# Altium PCB DRV8432.PcbDoc
Units mil, origin at the board's own origin, x right, y up, seen from the top; angles counter-clockwise.
Board outline 3164 x 1882 mil, 4 copper layers (Top Layer, Int1 (GND), Int2 (Signal), Bottom Layer), stack 57.373 mil thick; 51 components, 30 nets, 144 pads, 1485 vias.
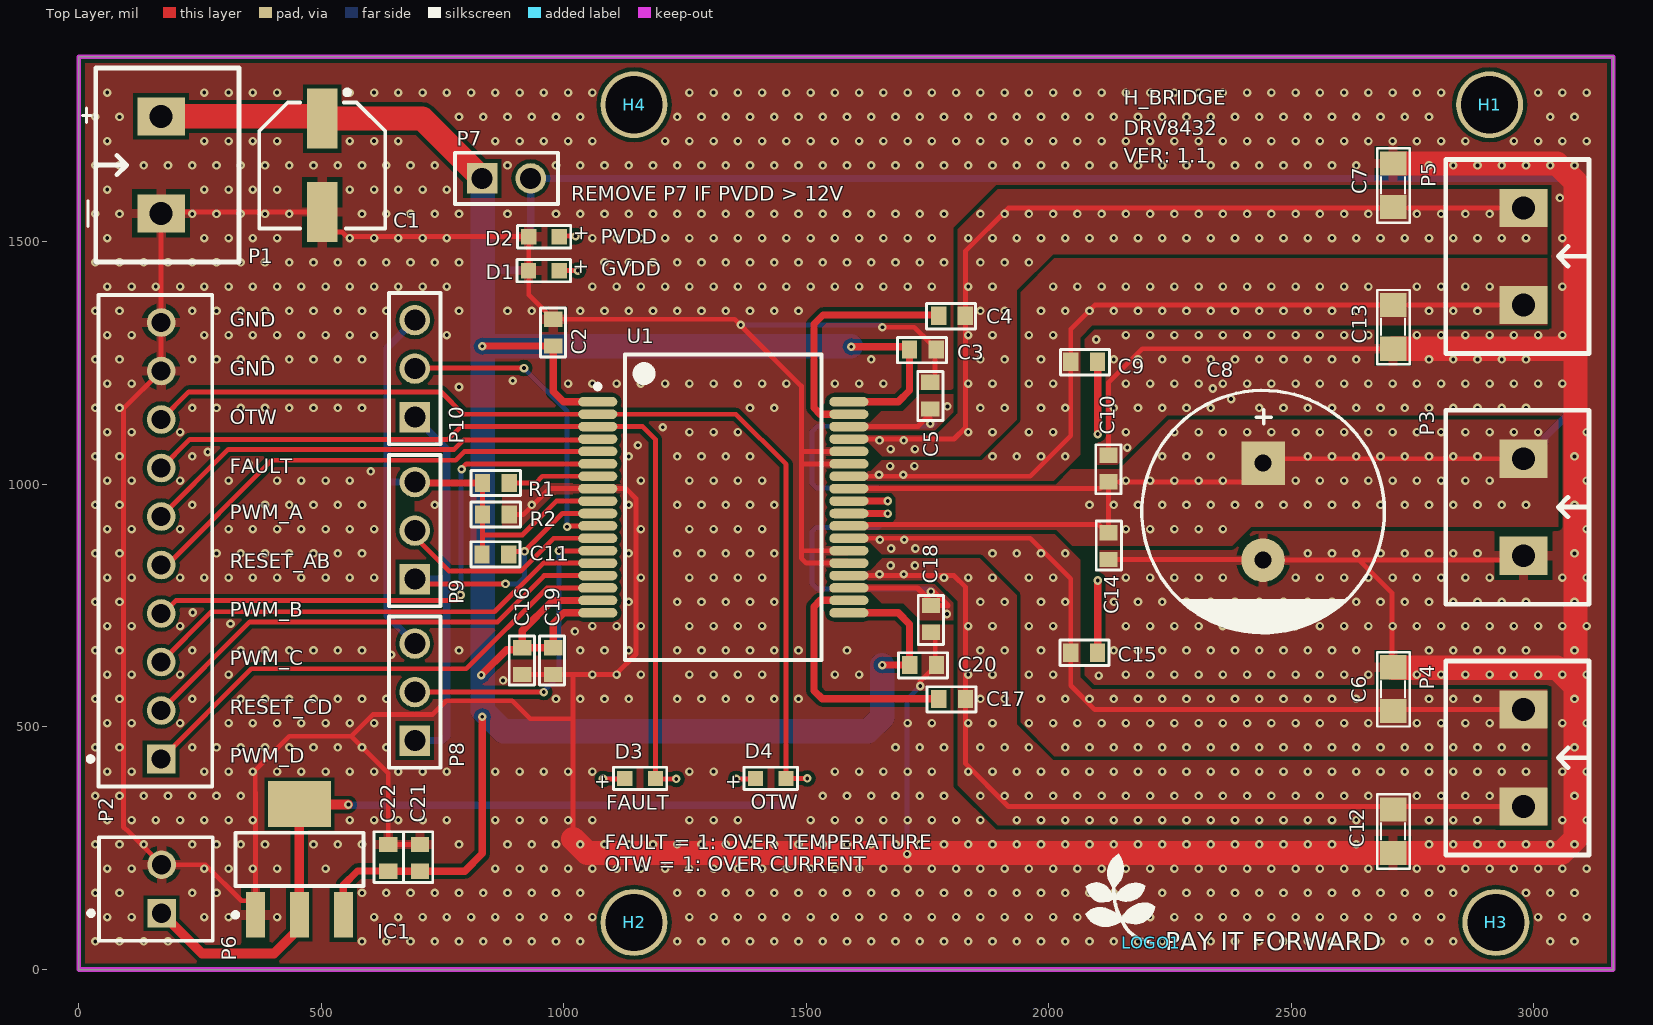
[diagram p0: Top Layer view]
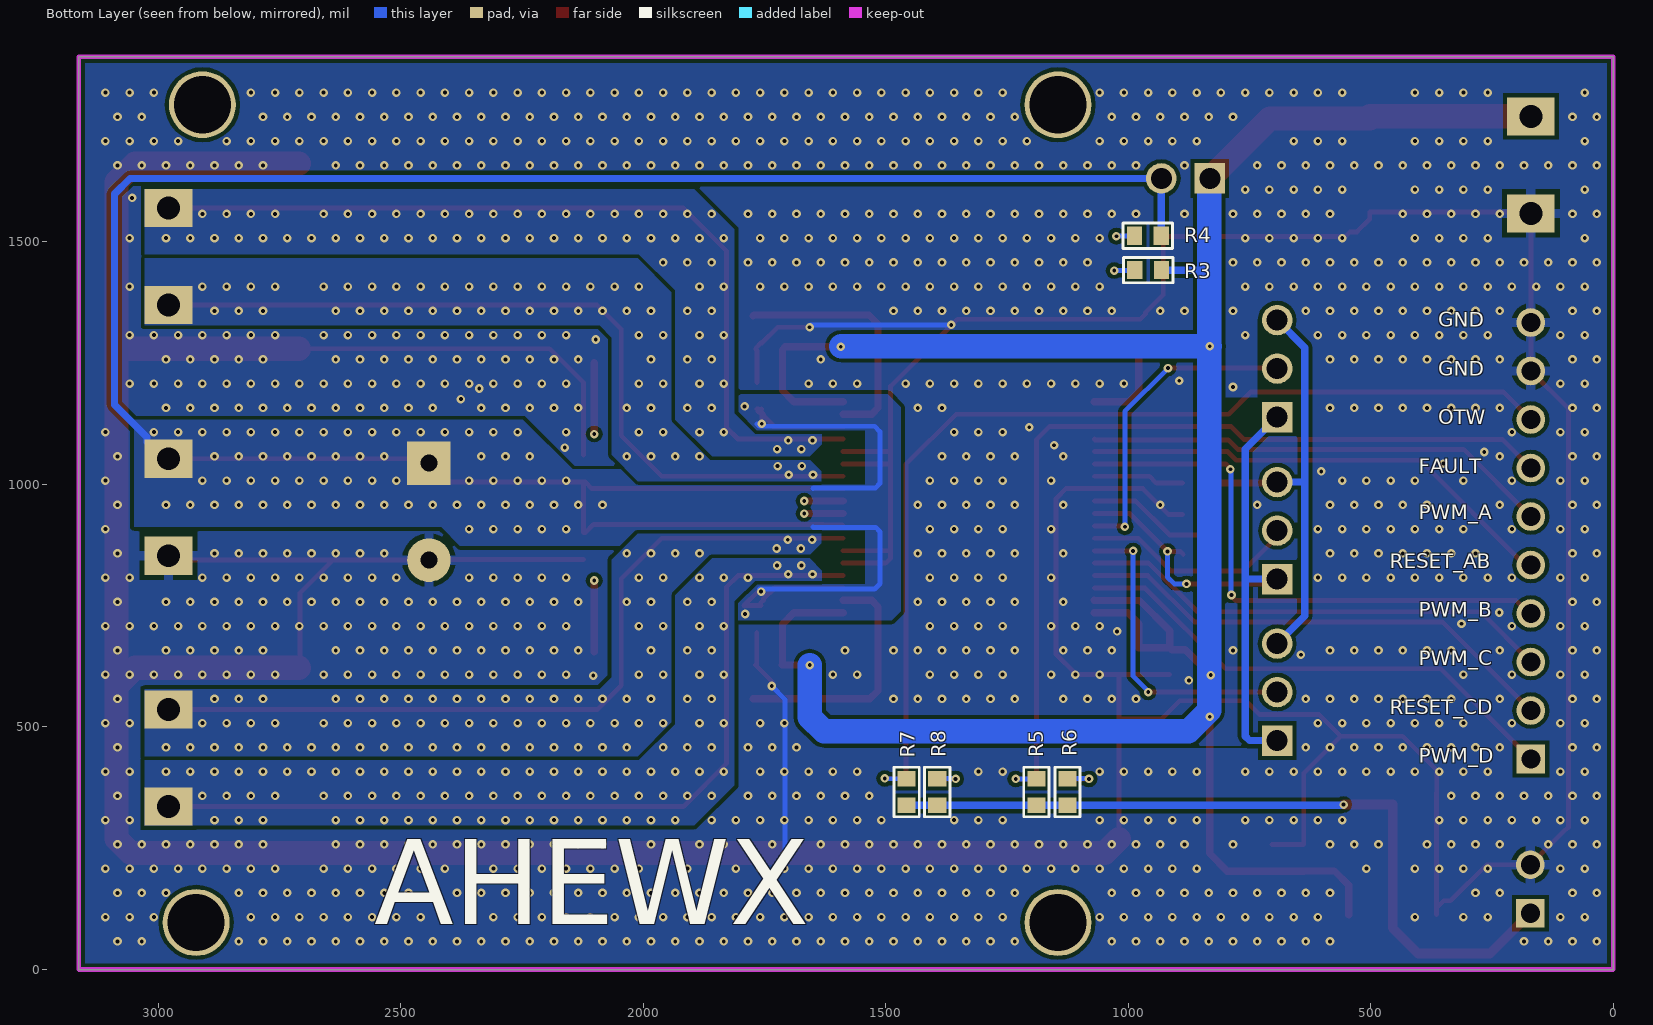
[diagram p1: Bottom Layer view, seen from below]
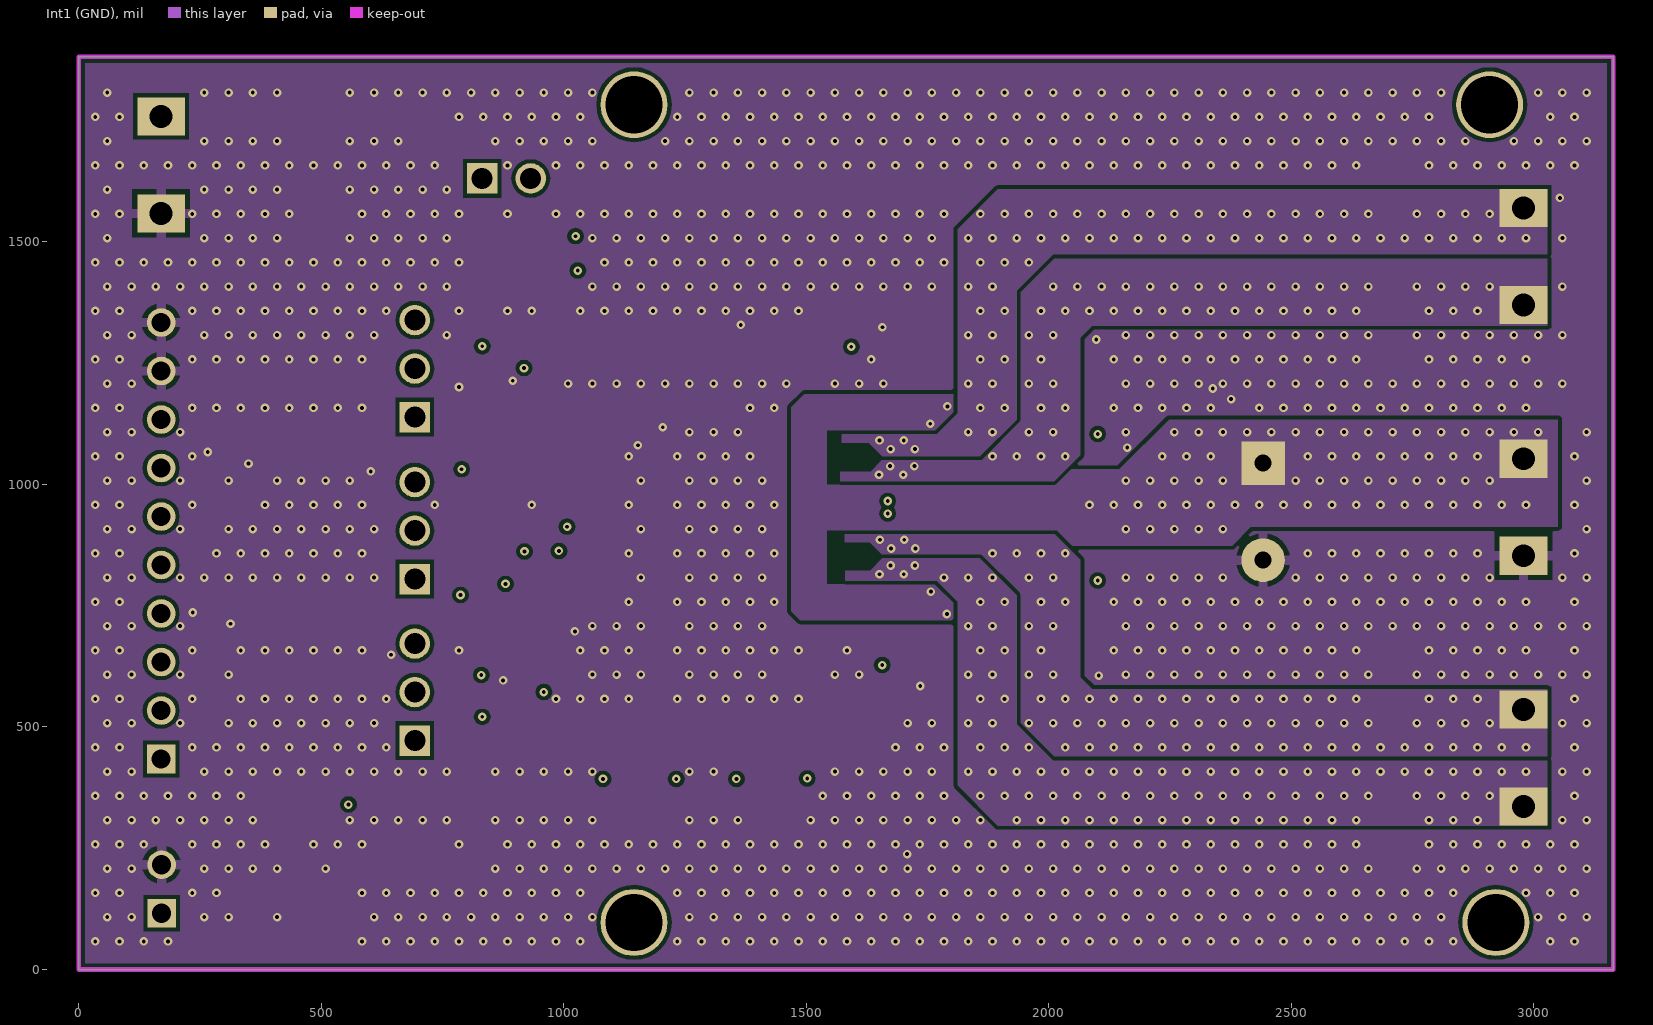
[diagram p2: Int1 (GND)]
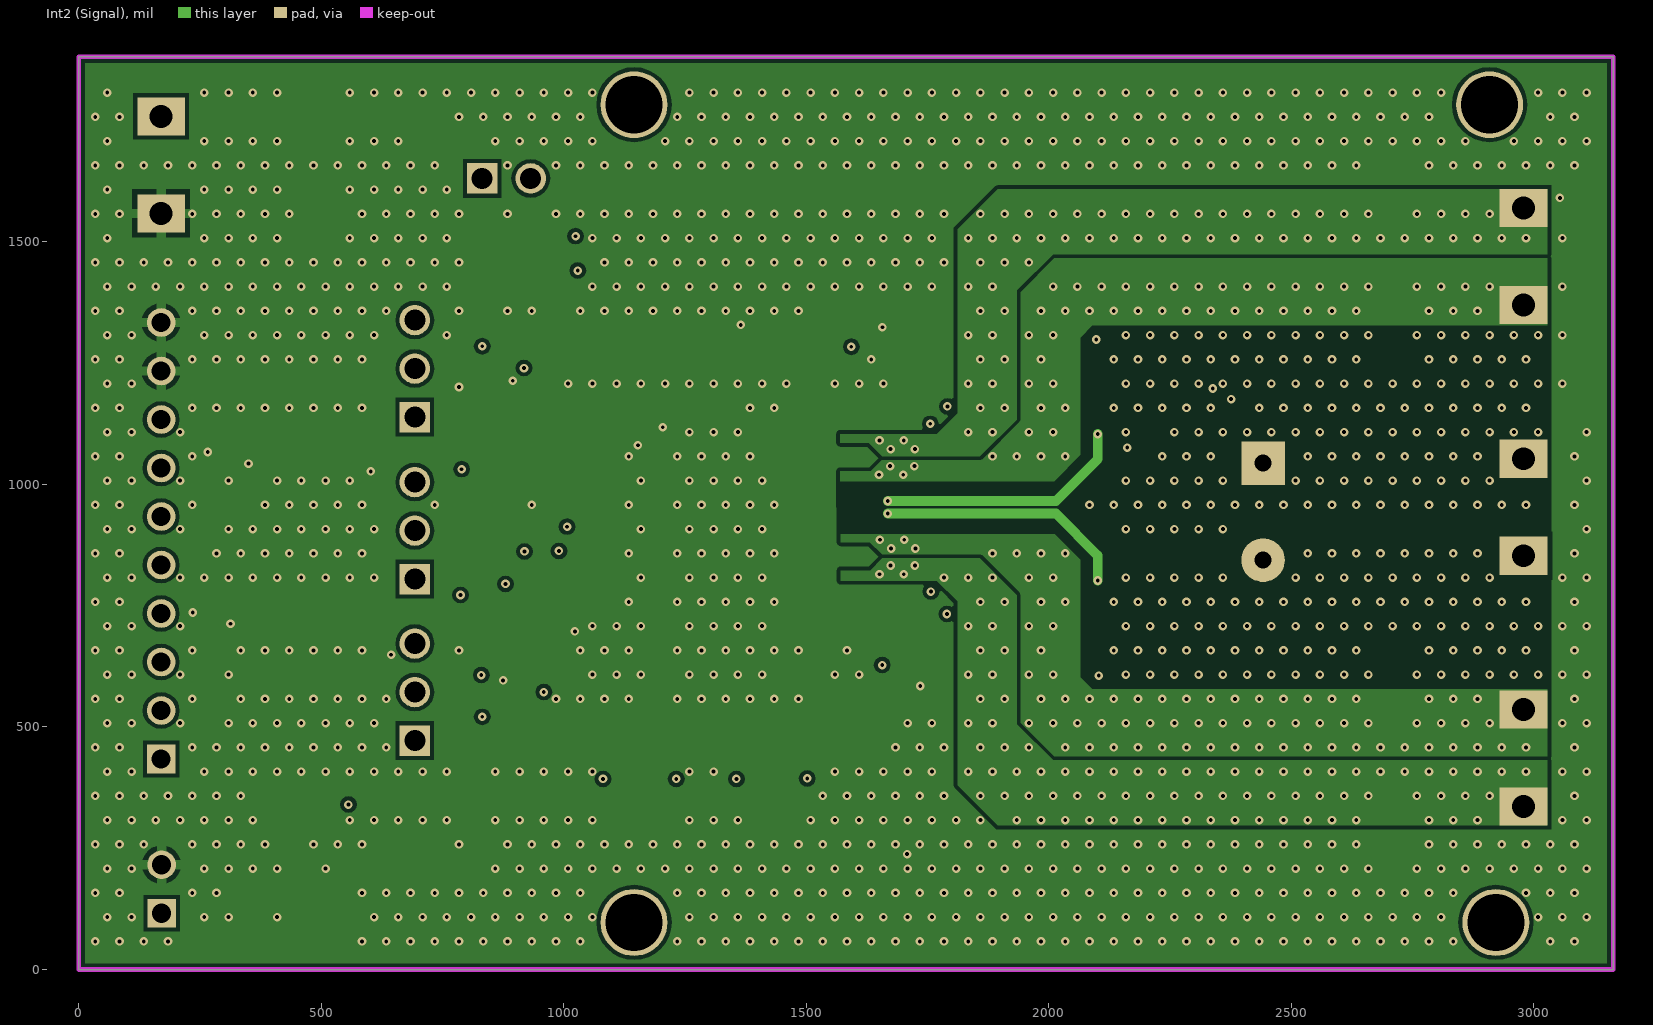
[diagram p3: Int2 (Signal)]
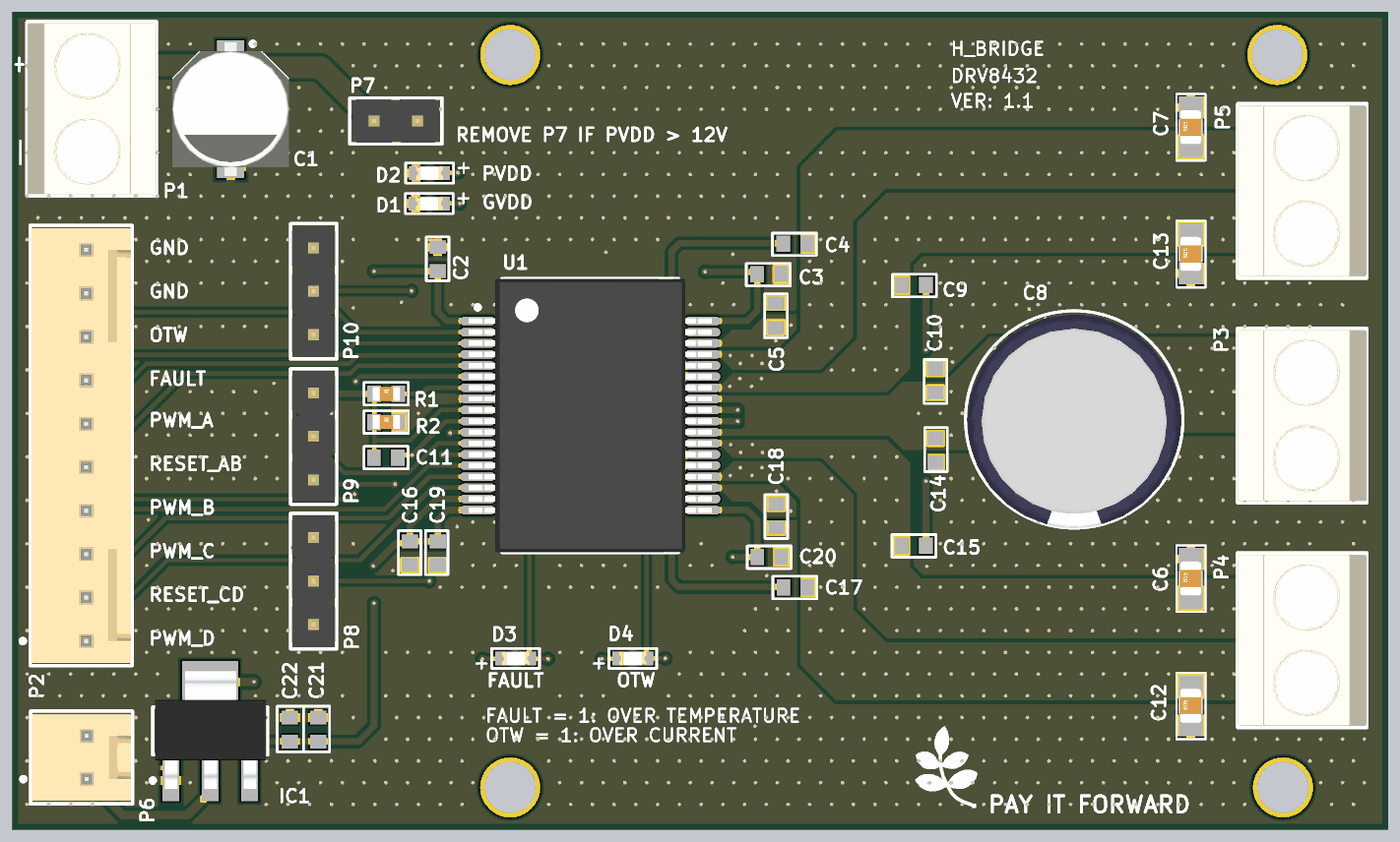
[diagram p4: 3D render of the assembled board from above, using the file's embedded part models]
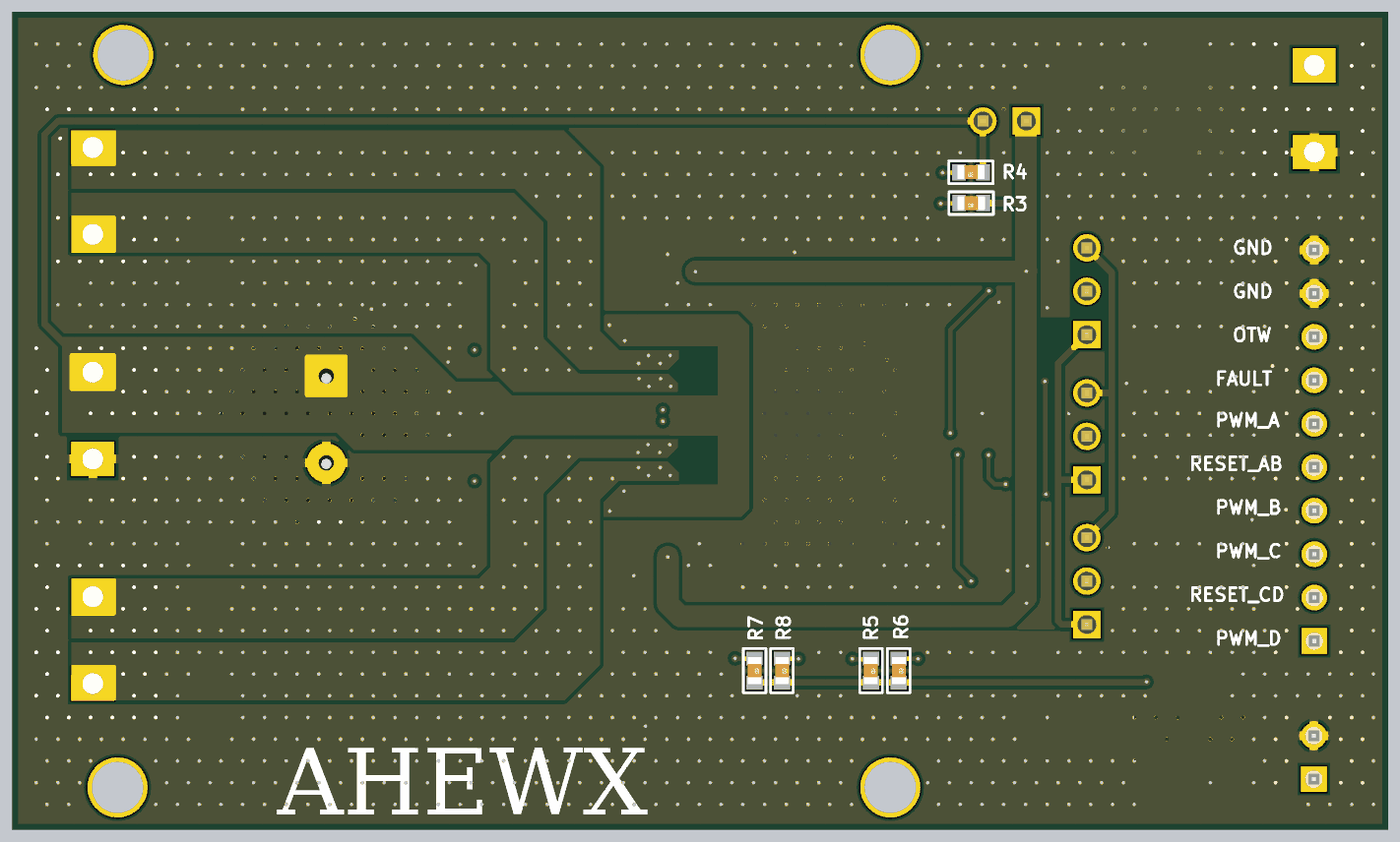
[diagram p5: 3D render of the assembled board from below, using the file's embedded part models]

## Layer stack, top to bottom
Top Solder: solder mask 1, SM-001, Dk 4
Top Layer: signal copper 1.378
Dielectric 1: prepreg 7.1, PP-021, Dk 4.7
Int1 (GND): signal copper 0.7087
Dielectric 3: core 39, Core-042, Dk 4.6
Int2 (Signal): signal copper 0.7087
Dielectric 5: prepreg 7.1, PP-021, Dk 4.7
Bottom Layer: signal copper 1.378
Bottom Solder: solder mask 1, SM-001, Dk 4

## Board outline
0,0 3164,0 3164,1882 0,1882

## Design rules (kind name [scope] priority, off if disabled: settings)
BoardOutlineClearance [All] p1: gap=7.87 ignorepadtopadclearanceinfootprint=FALSE except(15.75: Arc-SplitBarrior Arc-SplitContinuation Track-SplitBarrior Track-SplitContinuation SMDPad-SplitBarrior SMDPad-SplitContinuation THPad-SplitBarrior THPad-SplitContinuation Via-SplitBarrior Via-SplitContinuation Fill-SplitBarrior Fill-SplitContinuation Poly-SplitBarrior Poly-SplitContinuation Region-SplitBarrior Region-SplitContinuation Text-SplitBarrior Text-SplitContinuation)
Clearance "Clearance Bottom Layer" [OnLayer('Bottom Layer')] p1: gap=8 ignorepadtopadclearanceinfootprint=TRUE except(10: Arc-Text Track-Text SMDPad-Text THPad-Text Via-Text Fill-Text Poly-Text Region-Text Text-Text)
Clearance "Clearance Top Layer" [OnLayer('Top Layer')] p2: gap=8 ignorepadtopadclearanceinfootprint=TRUE except(10: Arc-Text Track-Text SMDPad-Text THPad-Text Via-Text Fill-Text Poly-Text Region-Text Text-Text)
Clearance [All] p3: gap=7.87 ignorepadtopadclearanceinfootprint=FALSE except(3.5: Arc-Arc Arc-Track Arc-SMDPad Track-Track Track-SMDPad SMDPad-SMDPad; 5: Arc-Via Track-Via SMDPad-Via THPad-Via Via-Via; 10: Arc-Text Track-Text SMDPad-Text THPad-Text Via-Text Fill-Text Poly-Text Region-Text Text-Text)
HoleSize [All] p1: absolutevalues=TRUE maxlimit=248.03 minlimit=7.87 maxpercent=80.000 minpercent=20.000
MinimumAnnularRing [All] p1: minimumring=3
MinimumSolderMaskSliver [All] p1: minsoldermaskwidth=3.94
PolygonConnect PolygonConnect_1 [All] p1: thpad.connectstyle=Relief thpad.reliefconductorwidth=20 thpad.reliefentries=4 thpad.polygonreliefangle="90 Angle" thpad.airgapwidth=10 smdpad.connectstyle=Relief smdpad.reliefconductorwidth=20 smdpad.reliefentries=4 smdpad.polygonreliefangle="90 Angle" smdpad.airgapwidth=10 via.connectstyle=Direct via.reliefconductorwidth=20 via.reliefentries=4 via.polygonreliefangle="90 Angle" via.airgapwidth=10
RoutingCorners [All] p1: cornerstyle=Round minsetback=100 maxsetback=100
RoutingVias [All] p1: holewidth=19.68 width=39.37 viastyle="Through Hole" minholewidth=7.87 minwidth=17.72 maxholewidth=39.37 maxwidth=78.74
SilkToSilkClearance [All] p1: silktosilkclearance=3.94
SilkToSolderMaskClearance [IsPad] p1: minsilkscreentomaskgap=3.94 clearancetoexposedcopper=TRUE
SolderMaskExpansion [All] p1: expansion=4 istentingtop=FALSE
Width [All] p1: maxlimit=100 minlimit=3.5 preferedwidth=15
25 further rules are at their usual default settings.

## Components (designator, comment, footprint, x,y, rotation, side; value= is the part's Value field where it differs from the comment)
C1 "Cap Pol SMD" "CAP ALU SIZE D" 502,1658 r270 top value=47uF
C2 "Cap Non-Pol SMD" CAP-SM-0603 978.44,1313 r270 top value=1uF
C3 "Cap Non-Pol SMD" CAP-SM-0603 1740.56,1278 r180 top value=1uF
C4 "Cap Non-Pol SMD" CAP-SM-0603 1800.56,1348 r180 top value=100nF
C5 "Cap Non-Pol SMD" CAP-SM-0603 1755.7,1183.34 r270 top value=100nF
C6 "Cap Non-Pol SMD" CAP-SM-0805 2710,533 r90 top value=1uF
C7 "Cap Non-Pol SMD" CAP-SM-0805 2710,1572 r90 top value=1uF
C8 "Cap Pol" CP2/5 2442,1044 r270 top value=1000uF
C9 "Cap Non-Pol SMD" CAP-SM-0603 2073,1253 r180 top value=100nF
C10 "Cap Non-Pol SMD" CAP-SM-0603 2123,1033 r90 top value=100nF
C11 "Cap Non-Pol SMD" CAP-SM-0603 859,856 r180 top value=100nF
C12 "Cap Non-Pol SMD" CAP-SM-0805 2710,240 r90 top value=1uF
C13 "Cap Non-Pol SMD" CAP-SM-0805 2710,1280 r90 top value=1uF
C14 "Cap Non-Pol SMD" CAP-SM-0603 2123,873 r90 top value=100nF
C15 "Cap Non-Pol SMD" CAP-SM-0603 2073,653 r0 top value=100nF
C16 "Cap Non-Pol SMD" CAP-SM-0603 914.44,636 r90 top value=1uF
C17 "Cap Non-Pol SMD" CAP-SM-0603 1800.94,557.63 r0 top value=100nF
C18 "Cap Non-Pol SMD" CAP-SM-0603 1757,723 r270 top value=100nF
C19 "Cap Non-Pol SMD" CAP-SM-0603 978.44,636 r90 top value=1uF
C20 "Cap Non-Pol SMD" CAP-SM-0603 1740.94,627.63 r180 top value=1uF
C21 "Cap Non-Pol SMD" CAP-SM-0603 703.46,230.31 r270 top value=1uF
C22 "Cap Non-Pol SMD" CAP-SM-0603 638.06,230.31 r270 top value=100nF
D1 "Red, 2V" WL-SMCW_0603_H=0.7mm 958.99,1440.97 r0 top
D2 "Red, 2V" WL-SMCW_0603_H=0.7mm 959.5,1511 r0 top
D3 "Red, 2V" WL-SMCW_0603_H=0.7mm 1157.5,394 r180 top
D4 "Red, 2V" WL-SMCW_0603_H=0.7mm 1426.99,394 r180 top
H1 "Hole" "LO KHOAN 3MM" 2909,1783 r0 top
H2 "Hole" "LO KHOAN 3MM" 1145,97 r0 top
H3 "Hole" "LO KHOAN 3MM" 2922,97 r0 top
H4 "Hole" "LO KHOAN 3MM" 1145,1783 r0 top
IC1 "LM1117" SOT223-4N 455,227 r90 top value=LM317
LOGO1 "LOGO PIF" "PIF LOGO SMALL TOP" 2021,244 r180 top
P1 "Domino 2" "DOMINO 2- 5mm" 170,1659 r90 top
P2 "61901011121" 61901011121 158.19,884 r270 top
P3 "Domino 2" "DOMINO 2- 5mm" 2979,953 r270 top
P4 "Domino 2" "DOMINO 2- 5mm" 2979,436 r270 top
P5 "Domino 2" "DOMINO 2- 5mm" 2979,1470 r270 top
P6 "61900211121" 61900211121 159.19,166 r270 top
P7 "61300211121" 61300211121 882,1631 r0 top
P8 "61300311121" 61300311121 693,572 r90 top
P9 "61300311121" 61300311121 693,905 r90 top
P10 "61300311121" 61300311121 693,1239 r90 top
R1 "RESISTOR SMD" RES-SM-0603 860,1003 r0 top value=47K
R2 "RESISTOR SMD" RES-SM-0603 860,938 r0 top value=1
R3 "RESISTOR SMD" RES-SM-0603 958.99,1441.97 r0 bottom value=10K
R4 "RESISTOR SMD" RES-SM-0603 959.5,1513 r0 bottom value=10K
R5 "RESISTOR SMD" RES-SM-0603 1189.5,366 r270 bottom value=4.7K
R6 "RESISTOR SMD" RES-SM-0603 1125.5,366 r270 bottom value=330
R7 "RESISTOR SMD" RES-SM-0603 1456.99,366 r270 bottom value=4.7K
R8 "RESISTOR SMD" RES-SM-0603 1393.99,366 r270 bottom value=330
U1 "DRV8432" SOP65P1420X360-36N 1329,953 r0 top

## Footprints (in the part's own frame and the unit in brackets; to place one, negate y for a bottom-side part, rotate by r counter-clockwise, add the part's x,y. Pads: shape width x height; smd on the part's side, far side on the other; paste and mask are expansions set on the pad)
61300211121 [mm] "Pin Header, pitch 2.54 mm, THT, Vertical, single row, 2p"
  rect 1.6x1.6 hole 1.1: 1(-1.27,0)
  round 1.6 hole 1.1: 2(1.27,0)
  silkscreen extent -2.69,-1.35 2.69,1.35, body extent -2.54,-1.27 2.54,1.27, height 8.57
61300311121 [mm] "Pin Header, pitch 2.54 mm, THT, Vertical, single row, 3p"
  rect 1.6x1.6 hole 1.1: 1(-2.54,0)
  round 1.6 hole 1.1: 2(0,0) 3(2.54,0)
  silkscreen extent -3.96,-1.35 3.96,1.35, body extent -3.81,-1.27 3.81,1.27, height 8.57
61900211121 [mm] "2.54mm Male Locking Header, 2p"
  rect 1.5x1.5 hole 1: 1(1.27,0.3)
  round 1.5 hole 1: 2(-1.27,0.3)
  silkscreen extent -2.71,-3.52 2.71,2.98, body extent -2.54,-2.9 2.54,2.9, height 11.53
61901011121 [mm] "2.54mm Male Locking Header, 10p"
  rect 1.5x1.5 hole 1: 1(11.43,0.3)
  round 1.5 hole 1: 2(8.89,0.3) 3(6.35,0.3) 4(3.81,0.3) 5(1.27,0.3) 6(-1.27,0.3) 7(-3.81,0.3) 8(-6.35,0.3) 9(-8.89,0.3) 10(-11.43,0.3)
  silkscreen extent -12.87,-3.52 12.87,2.98, body extent -12.7,-2.9 12.7,2.9, height 11.53
"CAP ALU SIZE D" [mm] "Capacitor, Aluminium Electrolytric, 6.6mm L X 6.6mm W X 5.4mm H, IPC Medium Density"
  rect 3.15x1.6 smd: 1(-2.45,0) 2(2.45,0)
  silkscreen extent -3.95,-3.3 3.3,3.3, body extent -3.9,-3.4 3.9,3.4, height 5.7
CAP-SM-0603 [mm] "SMD Ceramic Capacitor Size 0603"
  rect 0.8x0.95 smd: 1(-0.7,0) 2(0.7,0)
  body extent -0.85,-0.45 0.85,0.45, height 0.6
CAP-SM-0805 [mil]
  rect 50x55 smd: 1(0,0) 2(90,0)
  silkscreen extent -32,-34 121,33, body extent 6,-25 84,25, height 31
CP2/5 [mil] "Tu hoa 1000uF/25V,50V"
  rect 90x90 hole 35: 1(0,0)
  round 90 hole 35: 2(200,0)
  silkscreen extent -150,-250 350,250, body extent -142,-246 350,246, height 984
"DOMINO 2- 5mm" [mm]
  rect 2x2.5 hole 1.2: 1(-2.54,0) 2(2.54,0)
  silkscreen extent -5.08,-4.08 5.08,3.43, body extent -5,-4.07 5,3.43, height 10
"LO KHOAN 3MM" [mil]
  round 138 hole 118.1: 1(0,0)
"PIF LOGO SMALL TOP" [mil]
  rect 10x10 on Top Overlay: 1(-190,189)
  silkscreen extent -199,5 -55,189
RES-SM-0603 [mm]
  rect 0.8x0.95 smd: 1(-0.7,0) 2(0.7,0)
  silkscreen extent -1.3,-0.66 1.3,0.66, body extent -0.8,-0.4 0.8,0.4, height 0.3
SOP65P1420X360-36N [mm] "SOP, 36-Leads, Body 15.90x11.00mm, Pitch 0.65mm, IPC Medium Density"
  oval 2.05x0.5 smd: 1(-6.575,5.525) 2(-6.575,4.875) 3(-6.575,4.225) 4(-6.575,3.575) 5(-6.575,2.925) 6(-6.575,2.275) 7(-6.575,1.625) 8(-6.575,0.975) 9(-6.575,0.325) 10(-6.575,-0.325) 11(-6.575,-0.975) 12(-6.575,-1.625) 13(-6.575,-2.275) 14(-6.575,-2.925) 15(-6.575,-3.575) 16(-6.575,-4.225) 17(-6.575,-4.875) 18(-6.575,-5.525) 19(6.575,-5.525) 20(6.575,-4.875) 21(6.575,-4.225) 22(6.575,-3.575) 23(6.575,-2.925) 24(6.575,-2.275) 25(6.575,-1.625) 26(6.575,-0.975) 27(6.575,-0.325) 28(6.575,0.325) 29(6.575,0.975) 30(6.575,1.625) 31(6.575,2.275) 32(6.575,2.925) 33(6.575,3.575) 34(6.575,4.225) 35(6.575,4.875) 36(6.575,5.525)
  silkscreen extent -6.7,-8 5.15,8, body extent -7.1,-8 7.1,8, height 3.6
SOT223-4N [mm] "SOT223, 4-Leads, Body 6.5x3.5mm, Pitch 2.3mm, Lead Span 7mm, IPC Medium Density"
  rect 2.4x1 smd: 1(-2.9,2.3) 2(-2.9,0) 3(-2.9,-2.3)
  rect 2.4x3.3 smd: 4(2.9,0)
  silkscreen extent -3.02,-3.35 1.4,3.47, body extent -3.39,-3.27 3.5,3.23, height 1.72
WL-SMCW_0603_H=0.7mm [mm] "SMD Mono-color Chip LED, body 1.6x0.8mm"
  rect 0.8x0.8 smd: 1(-0.8,0) 2(0.8,0)
  silkscreen extent -1.4,-0.58 1.4,0.58, body extent -0.8,-0.4 0.8,0.4, height 0.7

## Part data
C1 C8: "Polarized Capacitor (Radial)"
C2 C3 C4 C5 C6 C7 C9 C10 C11 C12 C13 C14 C15 C16 C17 C18 C19 C20 C21 C22: "Capacitor"
D1 D2 D3 D4: library part 150060RS75000, "WL-SMCW SMT Mono-color Chip LED Waterclear, size 0603, Red, 2V, 140deg", Emitting Color=Red, Forward Voltage typ.=2V, Operating Temperature="-40 to +85degC", Chip Technology=AlInGaP, ComponentLink1Description=Manufacturer, ComponentLink1URL=http://www.we-online.de, ComponentLink2Description=Datasheet, ComponentLink2URL=https://www.we-online.com/catalog/datasheet/150060RS75000.pdf, Dominant Wavelength typ.=625nm, Luminous Intensity typ.=250mcd, Mounting Technology=SMT, Packaging="Tape and Reel", Part Number=150060RS75000, Peak Wavelength typ.=630nm, Published Date="December 2019", Publisher="Wurth Elektronik", Size=0603, Viewing Angle=140deg
H1 H2 H3 H4: "Hole 3mm"
IC1: "Available in 1.8V, 2.5V, 2.85V, 3.3V, 5V, and  Adjustable Versions"
P1 P3 P4 P5: "Domino, 2-Pin", LatestRevisionDate=17-Jul-2002, LatestRevisionNote="Re-released for DXP Platform.", Publisher="Altium Limited"
P2: "WR-WTB THT Male Vertical Locking Header, pitch 2.54mm, 10p", Contact Resistance=20mOhm, Operating Temperature="-40 to +105degC", Rated Current=3A, Withstanding Voltage=1000VAC, Working Voltage=250VAC, ComponentLink1Description=Manufacturer, ComponentLink1URL=http://www.we-online.de, ComponentLink2Description=Datasheet, ComponentLink2URL=https://www.we-online.com/catalog/datasheet/61901011121.pdf, Gender=Male, Mounting Technology=THT, Packaging=Bag, Part Number=61901011121, Pin Number=10, Pitch=2.54mm, Published Date="January 2020", Publisher="Wurth Elektronik", Type=Vertical
P6: "WR-WTB THT Male Vertical Locking Header, pitch 2.54mm, 2p", Contact Resistance=20mOhm, Operating Temperature="-40 to +105degC", Rated Current=3A, Withstanding Voltage=1000VAC, Working Voltage=250VAC, ComponentLink1Description=Manufacturer, ComponentLink1URL=http://www.we-online.de, ComponentLink2Description=Datasheet, ComponentLink2URL=https://www.we-online.com/catalog/datasheet/61900211121.pdf, Gender=Male, Mounting Technology=THT, Packaging=Bag, Part Number=61900211121, Pin Number=2, Pitch=2.54mm, Published Date="January 2020", Publisher="Wurth Elektronik", Type=Vertical
P7: "WR-PHD Pin Header, THT, pitch 2.54mm, Single Row, Vertical, 2p", Contact Resistance=20mOhm, Manufacturer="Wurth Elektronik", Operating Temperature="-40 to +105degC", Rated Current=3A, Withstanding Voltage=500VAC, Working Voltage=250VAC, ComponentLink1Description=Manufacturer, ComponentLink1URL=http://www.we-online.de, ComponentLink2Description=Datasheet, ComponentLink2URL=https://www.we-online.com/catalog/datasheet/61300211121.pdf, Gender="Pin Header", Manufacturer Part Number=61300211121, Mounting Technology=THT, Orientation=Vertical, Packaging=Bag, Pin Number=2, Pitch=2.54mm, Published Date="May 2020", Row Number=Single
P8 P9 P10: "WR-PHD Pin Header, THT, pitch 2.54mm, Single Row, Vertical, 3p", Contact Resistance=20mOhm, Manufacturer="Wurth Elektronik", Operating Temperature="-40 to +105degC", Rated Current=3A, Withstanding Voltage=500VAC, Working Voltage=250VAC, ComponentLink1Description=Manufacturer, ComponentLink1URL=http://www.we-online.de, ComponentLink2Description=Datasheet, ComponentLink2URL=https://www.we-online.com/catalog/datasheet/61300311121.pdf, Gender="Pin Header", Manufacturer Part Number=61300311121, Mounting Technology=THT, Orientation=Vertical, Packaging=Bag, Pin Number=3, Pitch=2.54mm, Published Date="May 2020", Row Number=Single
R1 R2 R3 R4 R5 R6 R7 R8: "Resistor"

## Via types
v1: diameter 17.72/17.72/17.72/17.72 (per signal layer), hole 7.87, Top Layer to Bottom Layer, tented both sides, 1437 vias
v2: diameter 17.72, hole 7.87, Top Layer to Bottom Layer, tented both sides, 48 vias

## Nets (pads, with @x,y where several pads share a name; then routed paths per layer and width w, separated by ;. In a path a pad name is that pad's centre, name@x,y a point inside that pad or via, vN(x,y) a via of type N, cw(c..) or ccw(c..) an arc to the next point about the centre after c; other vN are vias at no path point)
5+: IC1.2 IC1.4 P6.1 R5.2 R6.2 R7.2 R8.2 | length 1598.8
  Top Layer w20: P6.1 254,33 402.73,33 455,85.27 IC1.2 455,341 456,340 v2(556,340)
  Bottom Layer w15: v2(556,340) 557.56,340 559.11,338.44 R6.2 R5.2 R8.2 R7.2
AGND: C11.2 P8.3 P9.3 P10.3 R1.1 R2.1 U1.9 | length 1307.3
  Top Layer w10: P9.3 P9.3@695,1003 ; C11.2@832.44,874 832.44,896 ; R1.1 R2.1 832.44,896 ; U1.9 984.8,965.8 915,896 832.44,896
  Top Layer w15: P9.3@695,1003 R1.1
  Bottom Layer w15: P8.3 636,729 636,1005.5 ; P9.3 636.5,1005 636,1005.5 ; P10.3 636,1282 636,1005.5
FAULT: D3.1 P2.7 R5.1 U1.3 | length 1853
  Top Layer w10: P2.7 229,1093 761.54,1093 787.88,1119.34 U1.3 1162.66,1119.34 1188.99,1093.01 D3.1 ; D3.1@1188,393 v2(1232,393)
  Bottom Layer w10: R5.1@1187.5,392.44 1231.44,392.44 v2(1232,393)
GND: C1.2 C2.1 C3.1 C5.1 C6.2 C7.2 C8.2 C10.2 C12.1 C13.1 C14.1 C16.1 C18.2 C19.1 C20.1 C21.1 C22.1 D1.1 D2.1 IC1.1 P1.1 P2.9 P2.10 P3.2 P6.2 R2.2 U1.8 U1.23 U1.24 U1.31 U1.32 | length 13965.7
  Top Layer w10: IC1.1 IC1.1@364.45,126.97 ; C21.1 C22.1 638.06,404.94 562,481 ; R2.2 916.45,938 969.83,991.39 U1.8 1128.61,991.39 1149,971 1149,650 1107.44,608.44 1019,608.44 C19.1 C16.1 ; 1019,269.29 1019,517 ; 1019,607.44 1019,517 ; U1.23 1500.16,837.84 1490,848 1490,865 ; U1.24 1491.57,863.43 1490,865 ; U1.31 1491.43,1042.57 1490,1044 ; U1.32 1490.84,1068.16 1490,1069 ; v2(1657,1324.13) 1722.87,1324.13 1755.3,1291.7 1757.37,1291.7 1768.12,1280.95 C3.1 1765.56,1275.44 C5.1@1765.56,1210.56 ; v2(1734.93,584.51) 1734.93,594.07 C20.1 1765.94,630.19 C18.2@1765.94,695.07 ; C14.1 2440.56,845.44 C8.2 2640,844 ; C10.2 2123,1210 2193,1280 C13.1 ; C6.2 2708,625 2708,776 2640,844 ; P3.2 2970,844 2640,844 ; IC1.1@364.45,126.97 364.45,365.55 364,366 364,411 434,481 562,481 ; IC1.1@364.45,126.97 349.76,141.65 335.62,141.65 261.28,216 P6.2 99,288 97.86,288 92,293.86 92,1156 P2.9 P2.10 P1.1 172.54,1561.54 C1.2 502,1547.4 528.5,1520.91 542.64,1520.91 552.54,1511 D2.1 928,1440.97 928,1391 964.74,1354.26 964.74,1351.31 975.49,1340.56 C2.1 1352.44,1340.56 1364.5,1328.5 1490,1203 1490,1069 ; 562,481 607,526 730,526 758,554 894,554 931,517 1019,517 ; 1490,865 1490,1044 ; 1490,1044 1490,1069
  Top Layer w50: 1019,269.29 1048.29,240 1708,240 C12.1 3056.71,240 3086,269.29 3086,584 ; C6.2@2710,622 3048,622 3086,584 ; C13.1 3056.71,1280 3086,1309.29 ; C7.2 3048,1662 3086,1624 3086,1309.29 ; 3086,584 3086,1309.29
  Bottom Layer w10: v2(1365,1329) 1655.27,1329 1657,1327.27 v2(1657,1324.13) ; v2(1708,238) 1708,557 1735.51,584.51 v2(1734.93,584.51)
  other v1: 34,58 84,58 134,58 184,58 584,58 634,58 684,58 734,58 784,58 834,58 884,58 934,58 984,58 1034,58 1234,58 1284,58 1334,58 1384,58 1434,58 1484,58 1534,58 1584,58 1634,58 1684,58 1734,58 1784,58 1834,58 1884,58 1934,58 1984,58 2034,58 2084,58 2134,58 2184,58 2234,58 2284,58 2334,58 2384,58 2434,58 2484,58 2534,58 2584,58 2634,58 2684,58 2734,58 2784,58 2834,58 3034,58 3084,58 59,108 109,108 259,108 309,108 409,108 609,108 659,108 709,108 759,108 809,108 859,108 909,108 959,108 1009,108 1059,108 1259,108 1309,108 1359,108 1409,108 1459,108 1509,108 1559,108 1609,108 1659,108 1709,108 1759,108 1809,108 1859,108 1909,108 1959,108 2009,108 2059,108 2109,108 2159,108 2209,108 2259,108 2309,108 2359,108 2409,108 2459,108 2509,108 2559,108 2609,108 2659,108 2709,108 2759,108 2809,108 3009,108 3059,108 3109,108 34,158 84,158 234,158 284,158 584,158 634,158 684,158 734,158 784,158 834,158 884,158 934,158 984,158 1034,158 1234,158 1284,158 1334,158 1384,158 1434,158 1484,158 1534,158 1584,158 1634,158 1684,158 1734,158 1784,158 1834,158 1884,158 1934,158 1984,158 2034,158 2084,158 2134,158 2184,158 2234,158 2284,158 2334,158 2384,158 2434,158 2484,158 2534,158 2584,158 2634,158 2684,158 2734,158 2784,158 2834,158 2984,158 3034,158 3084,158 59,208 109,208 259,208 309,208 359,208 409,208 509,208 859,208 909,208 959,208 1009,208 1059,208 1109,208 1159,208 1209,208 1259,208 1309,208 1359,208 1409,208 1459,208 1509,208 1559,208 1609,208 1659,208 1709,208 1759,208 1809,208 1859,208 1909,208 1959,208 2009,208 2059,208 2109,208 2159,208 2209,208 2259,208 2309,208 2359,208 2409,208 2459,208 2509,208 2559,208 2609,208 2659,208 2759,208 2809,208 2859,208 2909,208 2959,208 3009,208 3059,208 3109,208 34,258 84,258 134,258 234,258 284,258 334,258 384,258 484,258 534,258 584,258 784,258 884,258 934,258 984,258 1034,258 1084,258 1134,258 1184,258 1234,258 1284,258 1334,258 1384,258 1434,258 1484,258 1534,258 1584,258 1634,258 1684,258 1734,258 1784,258 1834,258 1884,258 1934,258 1984,258 2034,258 2084,258 2134,258 2184,258 2234,258 2284,258 2334,258 2384,258 2434,258 2484,258 2534,258 2584,258 2634,258 2784,258 2834,258 2884,258 2934,258 2984,258 3034,258 3084,258 59,308 109,308 159,308 209,308 259,308 309,308 359,308 559,308 609,308 659,308 709,308 759,308 859,308 909,308 959,308 1009,308 1059,308 1259,308 1309,308 1359,308 1509,308 1559,308 1609,308 1659,308 1709,308 1759,308 1809,308 1859,308 3059,308 3109,308 34,358 84,358 134,358 184,358 234,358 284,358 334,358 1534,358 1584,358 1634,358 1684,358 1734,358 1784,358 3084,358 59,408 109,408 259,408 309,408 359,408 409,408 459,408 509,408 559,408 609,408 659,408 709,408 759,408 859,408 909,408 959,408 1009,408 1059,408 1259,408 1309,408 1559,408 1609,408 1659,408 1709,408 1759,408 3059,408 3109,408 34,458 84,458 234,458 284,458 334,458 384,458 434,458 484,458 534,458 584,458 634,458 1684,458 1734,458 1784,458 3084,458 59,508 109,508 209,508 309,508 359,508 409,508 459,508 509,508 559,508 609,508 1709,508 1759,508 3059,508 3109,508 34,558 84,558 234,558 334,558 384,558 434,558 484,558 534,558 584,558 634,558 984,558 1034,558 1084,558 1134,558 1234,558 1284,558 1334,558 1384,558 1434,558 1484,558 3084,558 875,596 2103,606 59,608 109,608 209,608 309,608 1059,608 1109,608 1159,608 1259,608 1309,608 1359,608 1409,608 1559,608 1609,608 2159,608 2209,608 2259,608 2309,608 2359,608 2409,608 2459,608 2509,608 2559,608 2609,608 2659,608 2759,608 2809,608 2859,608 2909,608 2959,608 3009,608 3059,608 3109,608 644,649 34,658 84,658 234,658 334,658 384,658 434,658 484,658 534,658 584,658 784,658 1034,658 1084,658 1134,658 1234,658 1284,658 1334,658 1384,658 1434,658 1484,658 1584,658 2134,658 2184,658 2234,658 2284,658 2334,658 2384,658 2434,658 2484,658 2534,658 2584,658 2634,658 2784,658 2834,658 2884,658 2934,658 2984,658 3084,658 1023,697 59,708 109,708 209,708 1059,708 1109,708 1159,708 1259,708 1309,708 1359,708 1409,708 2159,708 2209,708 2259,708 2309,708 2359,708 2409,708 2459,708 2509,708 2559,708 2609,708 2659,708 2709,708 2759,708 2809,708 2859,708 2909,708 2959,708 3009,708 3059,708 3109,708 313,713 235,736 34,758 84,758 1134,758 1234,758 1284,758 1334,758 1384,758 1434,758 2134,758 2184,758 2234,758 2284,758 2334,758 2384,758 2434,758 2484,758 2534,758 2584,758 2634,758 2684,758 2734,758 2784,758 2834,758 2884,758 2934,758 2984,758 3084,758 59,808 109,808 209,808 259,808 309,808 359,808 409,808 459,808 509,808 559,808 609,808 1159,808 1259,808 1309,808 1359,808 1409,808 2159,808 2209,808 2259,808 2309,808 2359,808 2509,808 2559,808 2609,808 2659,808 2709,808 2759,808 2809,808 2859,808 2909,808 3059,808 3109,808 34,858 84,858 284,858 334,858 384,858 434,858 484,858 534,858 584,858 1134,858 1234,858 1284,858 1334,858 1384,858 1434,858 2534,858 2584,858 2634,858 2684,858 2734,858 2784,858 2834,858 2884,858 3084,858 59,908 109,908 209,908 309,908 359,908 409,908 459,908 509,908 559,908 609,908 1159,908 1259,908 1309,908 1359,908 1409,908 3109,908 34,958 84,958 234,958 384,958 434,958 484,958 534,958 584,958 734,958 934,958 1134,958 1234,958 1284,958 1334,958 1384,958 1434,958 3084,958 59,1008 109,1008 209,1008 309,1008 409,1008 459,1008 509,1008 559,1008 1159,1008 1259,1008 1309,1008 1359,1008 1409,1008 3109,1008 602,1027 350,1043 34,1058 84,1058 234,1058 1134,1058 1234,1058 1284,1058 1334,1058 1384,1058 3084,1058 266,1067 2162,1076 1153,1081 59,1108 109,1108 209,1108 1259,1108 1309,1108 1359,1108 2159,1108 3109,1108 1204,1118 34,1158 84,1158 234,1158 284,1158 334,1158 384,1158 434,1158 484,1158 534,1158 584,1158 1384,1158 1434,1158 2134,1158 2184,1158 2234,1158 2284,1158 2334,1158 2434,1158 2484,1158 2534,1158 2584,1158 2634,1158 2684,1158 2734,1158 2784,1158 2834,1158 2884,1158 2934,1158 2984,1158 2376,1176 2338,1198 784,1201 59,1208 109,1208 1009,1208 1059,1208 1109,1208 1159,1208 1209,1208 1259,1208 1309,1208 1359,1208 1409,1208 1459,1208 1559,1208 1609,1208 1659,1208 2159,1208 2209,1208 2259,1208 2309,1208 2359,1208 2409,1208 2459,1208 2509,1208 2559,1208 2609,1208 2659,1208 2709,1208 2759,1208 2809,1208 2859,1208 2909,1208 2959,1208 3009,1208 3059,1208 895,1214 34,1258 84,1258 234,1258 284,1258 334,1258 384,1258 434,1258 484,1258 534,1258 584,1258 1634,1258 2134,1258 2184,1258 2234,1258 2284,1258 2334,1258 2384,1258 2434,1258 2484,1258 2534,1258 2584,1258 2634,1258 2784,1258 2834,1258 2884,1258 2934,1258 2984,1258 2098,1299 59,1308 109,1308 259,1308 309,1308 359,1308 409,1308 459,1308 509,1308 559,1308 609,1308 759,1308 2159,1308 2209,1308 2259,1308 2309,1308 2359,1308 2409,1308 2459,1308 2509,1308 2559,1308 2609,1308 2659,1308 2759,1308 2809,1308 2859,1308 2909,1308 2959,1308 3009,1308 3059,1308 34,1358 84,1358 234,1358 284,1358 334,1358 384,1358 434,1358 484,1358 534,1358 584,1358 634,1358 784,1358 884,1358 934,1358 1034,1358 1084,1358 1134,1358 1184,1358 1234,1358 1284,1358 1334,1358 1384,1358 1434,1358 1484,1358 59,1408 109,1408 159,1408 209,1408 259,1408 309,1408 359,1408 409,1408 459,1408 509,1408 559,1408 609,1408 659,1408 709,1408 759,1408 1059,1408 1109,1408 1159,1408 1209,1408 1259,1408 1309,1408 1359,1408 1409,1408 1459,1408 1509,1408 1559,1408 1609,1408 1659,1408 1709,1408 1759,1408 3059,1408 34,1458 84,1458 134,1458 184,1458 234,1458 284,1458 334,1458 384,1458 434,1458 484,1458 534,1458 584,1458 634,1458 684,1458 734,1458 784,1458 1084,1458 1134,1458 1184,1458 1234,1458 1284,1458 1334,1458 1384,1458 1434,1458 1484,1458 1534,1458 1584,1458 1634,1458 1684,1458 1734,1458 1784,1458 59,1508 259,1508 309,1508 359,1508 409,1508 559,1508 609,1508 659,1508 709,1508 759,1508 1059,1508 1109,1508 1159,1508 1209,1508 1259,1508 1309,1508 1359,1508 1409,1508 1459,1508 1509,1508 1559,1508 1609,1508 1659,1508 1709,1508 1759,1508 3059,1508 34,1558 84,1558 234,1558 284,1558 334,1558 384,1558 434,1558 584,1558 634,1558 684,1558 734,1558 784,1558 884,1558 984,1558 1034,1558 1084,1558 1134,1558 1184,1558 1234,1558 1284,1558 1334,1558 1384,1558 1434,1558 1484,1558 1534,1558 1584,1558 1634,1558 1684,1558 1734,1558 1784,1558 3054,1591 59,1608 259,1608 309,1608 359,1608 409,1608 559,1608 609,1608 659,1608 709,1608 759,1608 34,1658 84,1658 134,1658 184,1658 234,1658 284,1658 334,1658 384,1658 434,1658 484,1658 534,1658 584,1658 634,1658 684,1658 734,1658 884,1658 984,1658 1034,1658 1084,1658 1134,1658 1184,1658 1234,1658 1284,1658 1334,1658 1384,1658 1434,1658 1484,1658 1534,1658 1584,1658 1634,1658 1684,1658 1734,1658 1784,1658 1834,1658 1884,1658 1934,1658 1984,1658 2034,1658 2084,1658 2134,1658 2184,1658 2234,1658 2284,1658 2334,1658 2384,1658 2434,1658 2484,1658 2534,1658 2584,1658 2634,1658 2784,1658 2834,1658 2884,1658 2934,1658 2984,1658 3034,1658 3084,1658 59,1708 259,1708 309,1708 359,1708 409,1708 559,1708 609,1708 659,1708 859,1708 909,1708 959,1708 1009,1708 1059,1708 1209,1708 1259,1708 1309,1708 1359,1708 1409,1708 1459,1708 1509,1708 1559,1708 1609,1708 1659,1708 1709,1708 1759,1708 1809,1708 1859,1708 1909,1708 1959,1708 2009,1708 2059,1708 2109,1708 2159,1708 2209,1708 2259,1708 2309,1708 2359,1708 2409,1708 2459,1708 2509,1708 2559,1708 2609,1708 2659,1708 2709,1708 2759,1708 2809,1708 2859,1708 2959,1708 3009,1708 3059,1708 3109,1708 34,1758 84,1758 784,1758 834,1758 884,1758 934,1758 984,1758 1034,1758 1234,1758 1284,1758 1334,1758 1384,1758 1434,1758 1484,1758 1534,1758 1584,1758 1634,1758 1684,1758 1734,1758 1784,1758 1834,1758 1884,1758 1934,1758 1984,1758 2034,1758 2084,1758 2134,1758 2184,1758 2234,1758 2284,1758 2334,1758 2384,1758 2434,1758 2484,1758 2534,1758 2584,1758 2634,1758 2684,1758 2734,1758 2784,1758 3034,1758 3084,1758 59,1808 259,1808 309,1808 359,1808 409,1808 559,1808 609,1808 659,1808 709,1808 759,1808 809,1808 859,1808 909,1808 959,1808 1009,1808 1059,1808 1259,1808 1309,1808 1359,1808 1409,1808 1459,1808 1509,1808 1559,1808 1609,1808 1659,1808 1709,1808 1759,1808 1809,1808 1859,1808 1909,1808 1959,1808 2009,1808 2059,1808 2109,1808 2159,1808 2209,1808 2259,1808 2309,1808 2359,1808 2409,1808 2459,1808 2509,1808 2559,1808 2609,1808 2659,1808 2709,1808 2759,1808 2809,1808 3009,1808 3059,1808 3109,1808
GVDD: C1.1 C2.2 C3.2 C16.2 C19.2 C20.2 C21.2 C22.2 IC1.3 P1.2 P7.1 R3.1 U1.1 U1.17 U1.18 U1.19 U1.36 | length 5776.5
  Top Layer w15: IC1.3 545.55,173.55 575,203 C22.2@638.06,203 ; C22.2 C21.2 795.75,202.75 832,239 v2(832,521) ; v2(830,607) 882.36,659.36 910.24,659.36 C16.2 ; v2(832,1285) 832.2,1285 832.64,1285.44 C2.2 978.44,1191.56 999.48,1170.52 U1.1 ; U1.18 1000.48,735.48 978.44,713.44 C19.2 C16.2 ; U1.17 1070.07,761 977,761 914.44,698.44 C16.2 ; U1.19 1689.52,735.48 1713,712 C20.2@1713,628 ; U1.36 1689.52,1170.52 1713,1194 C3.2 1707,1284 v2(1593,1284) ; v2(1656.63,627.63) C20.2
  Top Layer w50: P1.2 C1.1@502,1759 ; C1.1 708.54,1754.46 P7.1
  Bottom Layer w10: 833,1447 838.03,1441.97
  Bottom Layer w15: 838.03,1441.97 R3.1
  Bottom Layer w50: v2(832,1285) v2@833,1285 ; 833,534 v2@833,1285 ; P7.1@833,1631 833,1447 v2@833,1285 ; 839,528 876,491 1627.34,491 1656.63,520.29 v2(1656.63,627.63) ; v2@1592,1285 v2@833,1285
M1: P8.2 U1.13 | length 651
  Top Layer w10: P8.2 v2(959,572) ; v2(990,863) 1069.71,863 U1.13
  Bottom Layer w10: v2@957,572 990,605 v2(990,863)
M2: P9.2 U1.12 | length 447.5
  Top Layer w10: P9.2 693,892 763.69,821.31 911.31,821.31 979.02,889.02 U1.12
M3: P10.2 U1.11 | length 656.4
  Top Layer w10: P10.2 695,1241 699,1237 702,1240 v2(918,1240) ; v2(1007,913) 1008.56,913 1010.17,914.61 U1.11
  Bottom Layer w10: v2(918,1240) 1007,1151 v2(1007,913)
NetC4_2: C4.2 U1.35 | length 515.7
  Top Layer w15: U1.35 1529.07,1144.93 1516,1158 1516,1331 1534.62,1349.62 1771.38,1349.62 C4.2
NetC9_1: C9.1 U1.28 | length 750.5
  Top Layer w10: v2@1667.8,965.8 v2(1668,966) ; C9.1 2100,1252.44 C9.1@2101,1251.44
  Top Layer w15: U1.28 v2@1667.8,965.8 ; v2(2101,1104) C9.1@2101,1251.44
  Int2 (Signal) w20: v2(1668,966) 2015,966 2101,1052 v2(2101,1104)
NetC15_2: C15.2 U1.27 | length 750.5
  Top Layer w10: v2@1667.8,940.2 v2(1668,940) ; C15.2 2100,653.56 C15.2@2101,654.56
  Top Layer w15: U1.27 v2@1667.8,940.2 ; C15.2@2101,654.56 v2(2101,802)
  Int2 (Signal) w20: v2(1668,940) 2015,940 2101,854 v2(2101,802)
NetC17_1: C17.1 U1.20 | length 514.3
  Top Layer w15: U1.20 1529.07,761.07 1516,748 1516,575 1533,558 C17.1@1773,558
NetD1_2: D1.2 R3.2 | length 81.4
  Top Layer w10: D1.2 v2(1028.99,1440.97)
  Bottom Layer w10: R3.2 987.55,1440.97 v2(1028.99,1440.97)
NetD2_2: D2.2 R4.2 | length 79.9
  Top Layer w10: D2.2@985.99,1512 v2(1024.5,1512)
  Bottom Layer w10: R4.2@983.06,1512 v2(1024.5,1512)
NetD3_2: D3.2 R6.1 | length 90.1
  Top Layer w10: v2(1081,393) 1125,393 D3.2
  Bottom Layer w10: v2(1081,393) 1081.56,393.56 R6.1
NetD4_2: D4.2 R8.1 | length 88.7
  Top Layer w10: v2(1356,393) D4.2@1400,393
  Bottom Layer w10: v2(1356,393) 1356.56,393.56 R8.1@1400.5,393.56
NetR1_2: R1.2 U1.7 | length 188.4
  Top Layer w10: R1.2 942,1003 955.98,1016.98 U1.7
OTW: D4.1 P2.8 R7.1 U1.2 | length 2110.3
  Top Layer w10: P2.8 227,1191 747,1191 793.07,1144.93 U1.2 1355.07,1144.93 1458.49,1041.51 D4.1 ; D4.1@1458,394 v2(1502,394)
  Bottom Layer w10: R7.1@1457.5,393.44 1501.44,393.44 v2(1502,394)
OUTA: C4.1 C7.1 P5.1 U1.33 | length 1802.2
  Top Layer w10: U1.33 1804.75,1093.75 1828.5,1117.5 C4.1@1828.5,1348.37 ; C4.1 1828.12,1481.12 1917,1570 P5.1
  other v1: 1834,1108 1884,1108 1859,1158 1909,1158 1834,1208 1884,1208 1859,1258 1909,1258 1834,1308 1884,1308 1859,1358 1909,1358 1834,1408 1884,1408 1859,1458 1909,1458 1959,1458 1834,1508 1884,1508 1934,1508 1984,1508 2034,1508 2084,1508 2134,1508 2184,1508 2234,1508 2284,1508 2334,1508 2384,1508 2434,1508 2484,1508 2534,1508 2584,1508 2634,1508 2684,1508 2734,1508 2784,1508 2834,1508 2884,1508 2934,1508 2984,1508 1859,1558 1909,1558 1959,1558 2009,1558 2059,1558 2109,1558 2159,1558 2209,1558 2259,1558 2309,1558 2359,1558 2409,1558 2459,1558 2509,1558 2559,1558 2609,1558 2659,1558 2759,1558 2809,1558 2859,1558 2909,1558
  other v2: 1674,1073 1724,1073 1651,1091 1701,1091
OUTB: C9.2 C13.2 P5.2 U1.30 | length 1669.2
  Top Layer w10: U1.30 1961.98,1016.98 2045.44,1100.44 C9.2@2045.44,1255.95 ; C9.2 2045.44,1320.44 2095,1370 C13.2 P5.2
  other v1: 1884,1058 1934,1058 1984,1058 2034,1058 1959,1108 2009,1108 1984,1158 2034,1158 1959,1208 2009,1208 1984,1258 1959,1308 2009,1308 1984,1358 2034,1358 2084,1358 2134,1358 2184,1358 2234,1358 2284,1358 2334,1358 2384,1358 2434,1358 2484,1358 2534,1358 2584,1358 2634,1358 2784,1358 2834,1358 2884,1358 2009,1408 2059,1408 2109,1408 2159,1408 2209,1408 2259,1408 2309,1408 2359,1408 2409,1408 2459,1408 2509,1408 2559,1408 2609,1408 2659,1408 2759,1408 2809,1408 2859,1408 2909,1408
  other v2: 1650,1020 1700,1020 1673,1038 1723,1038
OUTC: C6.1 C15.1 P4.1 U1.25 | length 1669.2
  Top Layer w10: U1.25 1961.98,889.02 2045.44,805.56 C15.1@2045.44,650.05 ; C15.1 2045.44,585.56 2095,536 2710,536 P4.1
  other v1: 2034,458 2084,458 2134,458 2184,458 2234,458 2284,458 2334,458 2384,458 2434,458 2484,458 2534,458 2584,458 2634,458 2684,458 2734,458 2784,458 2834,458 2884,458 2934,458 2984,458 1959,508 2009,508 2059,508 2109,508 2159,508 2209,508 2259,508 2309,508 2359,508 2409,508 2459,508 2509,508 2559,508 2609,508 2659,508 2759,508 2809,508 2859,508 2909,508 1984,558 2034,558 2084,558 2134,558 2184,558 2234,558 2284,558 2334,558 2384,558 2434,558 2484,558 2534,558 2584,558 2634,558 2784,558 2834,558 2884,558 1959,608 2009,608 1984,658 1959,708 2009,708 1984,758 2034,758 1959,808 2009,808 1884,858 1934,858 1984,858 2034,858
  other v2: 1675,868 1725,868 1652,886 1702,886
OUTD: C12.2 C17.2 P4.2 U1.22 | length 1802.2
  Top Layer w10: U1.22 1804.75,812.25 1828.5,788.5 C17.2 ; C17.2@1828.12,558 1828.12,424.88 1917,336 P4.2
  other v1: 1934,308 1984,308 2034,308 2084,308 2134,308 2184,308 2234,308 2284,308 2334,308 2384,308 2434,308 2484,308 2534,308 2584,308 2634,308 2784,308 2834,308 2884,308 1859,358 1909,358 1959,358 2009,358 2059,358 2109,358 2159,358 2209,358 2259,358 2309,358 2359,358 2409,358 2459,358 2509,358 2559,358 2609,358 2659,358 2759,358 2809,358 2859,358 2909,358 1834,408 1884,408 1934,408 1984,408 2034,408 2084,408 2134,408 2184,408 2234,408 2284,408 2334,408 2384,408 2434,408 2484,408 2534,408 2584,408 2634,408 2684,408 2734,408 2784,408 2834,408 2884,408 2934,408 2984,408 1859,458 1909,458 1959,458 1834,508 1884,508 1859,558 1909,558 1834,608 1884,608 1859,658 1909,658 1834,708 1884,708 1859,758 1909,758 1784,808 1834,808 1884,808
  other v2: 1651,815 1701,815 1674,833 1724,833
PVDD: C5.2 C8.1 C10.1 C14.2 C18.1 P3.1 P7.2 R4.1 U1.21 U1.26 U1.29 U1.34 | length 6502
  Top Layer w10: U1.21 1729.47,786.66 1752.24,763.89 1752.24,760.94 1762.98,750.19 C18.1@1765.94,750.19 ; U1.26 1589.71,916.47 1627.07,916.47 1628.08,917.48 2103.13,917.48 2120.05,900.56 C14.2 C10.1 ; U1.29 2105.99,991.39 2120.05,1005.44 C10.1 ; U1.34 1729.46,1119.34 1751.86,1141.74 1751.86,1144.69 C5.2@1761.17,1154 ; C5.2 1757.49,1154 C5.2@1761.17,1154 ; v2(1755.76,1125.06) 1755.76,1143.69 1763.62,1151.55 C5.2@1761.17,1154 ; C18.1 1790.31,750.56 1791.51,749.37 1792.62,750.48 1763.97,779.13 v2(1757.14,779.13) ; C5.2@1765.56,1155.44 1762.61,1155.44 C5.2@1761.17,1154 ; P3.1 2451,1053 C8.1 2403.44,1005.44 C10.1
  Bottom Layer w10: 1649.86,912.48 1648.86,911.48 1520.86,911.48 1511.86,902.48 1511.86,795.48 1522.86,784.48 1760.86,784.48 1757.14,780.76 v2(1757.14,779.13) ; 1650,992 1649,993 1521,993 1512,1002 1512,1109 1523,1120 1761,1120 1766.06,1125.06 v2(1755.76,1125.06) ; C8.1@2438.86,1047.14 C8.1 C8.1@2439.86,1041.86
  Bottom Layer w15: R4.1 932,1513.06 P7.2 3058.39,1631 3090,1599.39 3090,1164 3023.21,1097.21 3023.21,1087.37 2988.84,1053 P3.1
  other v1: 2159,908 2209,908 2259,908 2309,908 2359,908 2084,958 2134,958 2184,958 2234,958 2284,958 2334,958 2384,958 2434,958 2484,958 2534,958 2584,958 2634,958 2684,958 2734,958 2784,958 2834,958 2884,958 2934,958 2984,958 2159,1008 2209,1008 2259,1008 2309,1008 2359,1008 2509,1008 2559,1008 2609,1008 2659,1008 2709,1008 2759,1008 2809,1008 2859,1008 2909,1008 2234,1058 2284,1058 2334,1058 2534,1058 2584,1058 2634,1058 2684,1058 2734,1058 2784,1058 2834,1058 2884,1058 2259,1108 2309,1108 2359,1108 2409,1108 2459,1108 2509,1108 2559,1108 2609,1108 2659,1108 2709,1108 2759,1108 2809,1108 2859,1108 2909,1108 2959,1108 3009,1108
  other v2: 1790,733 1791,1161
PWM_A: P2.6 U1.4 | length 966.3
  Top Layer w10: P2.6 308.32,1072.32 774.32,1072.32 794,1092 1068.39,1092 U1.4
PWM_B: P2.4 U1.6 | length 1180.6
  Top Layer w10: P2.4 173.56,734 200.07,760.5 778.38,760.5 787.1,769.22 v2(787.1,772.08) ; v2(789.54,1031.49) 792.01,1035.21 799.37,1042.57 U1.6
  Bottom Layer w10: v2(787.1,772.08) 788.32,773.31 788.32,1030.27 v2(789.54,1031.49)
PWM_C: P2.3 U1.14 | length 984.6
  Top Layer w10: P2.3 273.49,737.49 857.3,737.49 957.66,837.84 U1.14
PWM_D: P2.1 U1.16 | length 1046.2
  Top Layer w10: P2.1 356,620 799,620 965.66,786.66 U1.16
RESET_AB: P2.5 U1.5 | length 997.1
  Top Layer w10: P2.5 182.21,834 398.21,1050 777.46,1050 795.61,1068.16 U1.5
RESET_CD: P2.2 U1.15 | length 1015.4
  Top Layer w10: P2.2 352.8,716.8 864.03,716.8 959.49,812.25 U1.15
VREG: C11.1 P8.1 P9.1 P10.1 U1.10 | length 1328.7
  Top Layer w10: P9.1 703,795 v2(880,795) ; C11.1 892.56,862 v2(919.14,862) 997.35,940.2 U1.10
  Bottom Layer w10: v2(880,795) 905,795 919.14,809.14 v2(919.14,862)
  Bottom Layer w15: P8.1 750.21,472 759,480.79 759,805 ; P9.1 759,805 ; P10.1 759,1073 759,805
pads on no net: H1.1 H2.1 H3.1 H4.1 LOGO1.1

## Polygon pours and split planes (outlines as drawn)
GND on Top Layer "GND_L01_P028" (solid, remove dead copper, pour order 28): 0,0 3164,0 3164,1882 0,1882
PVDD on Top Layer "PVDD_L01_P004" (solid, remove dead copper, pour order 4): 1565.84,983 1675,983 1685,973 1685,929 1678.63,922.63 1565.82,922.63 1565.82,906.73 2015.45,906.73 2048.18,874 2378.55,874 2417.55,913 3050.66,913 3050.66,1133.69 2247.69,1133.69 2145.1,1031.1 2045.89,1031.1 2014.07,999.28 1566.06,999.28
OUTC on Top Layer "OUTC_L01_P027" (solid, remove dead copper, pour order 27): 1579,881.21 1630.84,881.21 1656.78,855.26 1859.78,855.26 1941.11,773.94 1941.11,509.94 2011.11,439.94 3028.11,439.94 3028.11,577.94 2090.11,577.94 2065.11,602.94 2065.11,844.94 2012.48,897.57 1579,897.57
OUTD on Top Layer "OUTD_L01_P026" (solid, remove dead copper, pour order 26): 1858.11,847.94 1934.11,771.94 1934.11,505.94 2009.11,430.94 3028.11,430.94 3028.11,296.94 1895.11,296.94 1812.11,379.94 1812.11,758.94 1769.11,801.94 1580,801.94 1580,822.59 1631.76,822.59 1657.1,847.94
OUTB on Top Layer "OUTB_L01_P025" (solid, remove dead copper, pour order 25): 1570,1027 1633.02,1027 1656.69,1050.67 1859.69,1050.67 1941.02,1132 1941.02,1396 2011.02,1466 3028.02,1466 3028.02,1328 2090.02,1328 2065.02,1303 2065.02,1061 2011.02,1007 1570,1007
OUTA on Top Layer "OUTA_L01_P024" (solid, remove dead copper, pour order 24): 1858.02,1058 1934.02,1134 1934.02,1400 2009.02,1475 3028.02,1475 3028.02,1609 1895.02,1609 1812.02,1526 1812.02,1147 1767.02,1102 1573,1102 1573,1086.21 1628.81,1086.21 1657.01,1058
PVDD on Top Layer "PVDD_L01_P017" (solid, remove dead copper, pour order 17): 1632.04,778.96 1656,755 1700,755 1735,720 1803,720 1803,756 1765,794 1548,794 1548,778.96
PVDD on Top Layer "PVDD_L01_P016" (solid, remove dead copper, pour order 16): 1631.36,1127.36 1655,1151 1699,1151 1734,1186 1803,1186 1803,1149 1765.76,1111.76 1577,1111.76 1577,1127.36
GND on Bottom Layer "GND_L04_P030" (solid, remove dead copper, pour order 30): 0,0 3164,0 3164,1882 0,1882
OUTD on Bottom Layer "OUTD_L04_P005" (solid, remove dead copper, pour order 5): 1858.09,847.94 1934.09,771.94 1934.09,505.94 2009.09,430.94 3028.09,430.94 3028.09,296.94 1895.09,296.94 1812.09,379.94 1812.09,758.94 1769.09,801.94 1631.74,801.94 1631.74,822.59 1657.09,847.94
PVDD on Bottom Layer "PVDD_L04_P019" (solid, remove dead copper, pour order 19): 2011.79,999 2014,999 2046,1031 2145,1031 2248,1134 3050,1134 3050,913 2417,913 2378,874 2049,874 2017,906 1542,906 1542,794 1765,794 1804,755 1804,720 1738,720 1488,720 1469,739 1469,1159 1496,1186 1803,1186 1803,1149 1766,1112 1542,1112 1542,999
OUTC on Bottom Layer "OUTC_L04_P008" (solid, remove dead copper, pour order 8): 1633.09,878.94 1656.76,855.26 1859.76,855.26 1941.09,773.94 1941.09,509.94 2011.09,439.94 3028.09,439.94 3028.09,577.94 2090.09,577.94 2065.09,602.94 2065.09,844.94 2011.09,898.94 1633.09,898.94
OUTB on Bottom Layer "OUTB_L04_P001" (solid, remove dead copper, pour order 1): 1633,1027 1655.54,1049.54 1858.54,1049.54 1941,1132 1941,1396 2011,1466 3028,1466 3028,1328 2090,1328 2065,1303 2065,1061 2011,1007 1633,1007
OUTA on Bottom Layer "OUTA_L04_P000" (solid, remove dead copper, pour order 0): 1858,1058 1934,1134 1934,1400 2009,1475 3028,1475 3028,1609 1895,1609 1812,1526 1812,1147 1769,1104 1631.65,1104 1631.65,1083.35 1657,1058
GND on Int1 (GND) "GND_L02_P018" (solid, remove dead copper, pour order 18): 0,0 3164,0 3164,1882 0,1882
OUTD on Int1 (GND) "OUTD_L02_P009" (solid, remove dead copper, pour order 9): 1858.11,847.73 1934.11,771.73 1934.11,505.73 2009.11,430.73 3028.11,430.73 3028.11,296.73 1895.11,296.73 1812.11,379.73 1812.11,758.73 1769.11,801.73 1580,801.73 1580,822.38 1631.76,822.38 1657.1,847.73
OUTA on Int1 (GND) "OUTA_L02_P006" (solid, remove dead copper, pour order 6): 1858.02,1057.79 1934.02,1133.79 1934.02,1399.79 2009.02,1474.79 3028.02,1474.79 3028.02,1608.79 1895.02,1608.79 1812.02,1525.79 1812.02,1146.79 1769.02,1103.79 1573,1103.79 1573,1086 1628.81,1086 1657.01,1057.79
OUTB on Int1 (GND) "OUTB_L02_P007" (solid, remove dead copper, pour order 7): 1570,1026.79 1633.02,1026.79 1656.69,1050.47 1859.69,1050.47 1941.02,1131.79 1941.02,1395.79 2011.02,1465.79 3028.02,1465.79 3028.02,1327.79 2090.02,1327.79 2065.02,1302.79 2065.02,1060.79 2011.02,1006.79 1570,1006.79
OUTC on Int1 (GND) "OUTC_L02_P014" (solid, remove dead copper, pour order 14): 1579,881 1630.84,881 1656.78,855.06 1859.78,855.06 1941.11,773.73 1941.11,509.73 2011.11,439.73 3028.11,439.73 3028.11,577.73 2090.11,577.73 2065.11,602.73 2065.11,844.73 2012.48,897.36 1579,897.36
PVDD on Int1 (GND) "PVDD_L02_P015" (solid, remove dead copper, pour order 15): 2011.79,999 2014,999 2046,1031 2145,1031 2248,1134 3050,1134 3050,913 2417,913 2378,874 2049,874 2017,906 1542,906 1542,794 1765,794 1803,756 1803,720 1738,720 1488,720 1469,739 1469,1159 1496,1186 1803,1186 1803,1149 1766,1112 1542,1112 1542,999
GND on Int2 (Signal) "GND_L03_P031" (solid, remove dead copper, pour order 31): 0,0 3164,0 3164,1882 0,1882
OUTC on Int2 (Signal) "OUTC_L03_P023" (solid, remove dead copper, pour order 23): 1570.97,881.21 1630.84,881.21 1656.78,855.26 1859.78,855.26 1941.11,773.94 1941.11,509.94 2011.11,439.94 3028.11,439.94 3028.11,577.94 2090.11,577.94 2065.11,602.94 2065.11,844.94 2012.48,897.57 1570.97,897.57
OUTA on Int2 (Signal) "OUTA_L03_P020" (solid, remove dead copper, pour order 20): 1858.02,1058 1934.02,1134 1934.02,1400 2009.02,1475 3028.02,1475 3028.02,1609 1895.02,1609 1812.02,1526 1812.02,1147 1769.02,1104 1569.84,1104 1569.84,1086.21 1628.81,1086.21 1657.01,1058
OUTB on Int2 (Signal) "OUTB_L03_P021" (solid, remove dead copper, pour order 21): 1570,1027 1633.02,1027 1656.69,1050.67 1859.69,1050.67 1941.02,1132 1941.02,1396 2011.02,1466 3028.02,1466 3028.02,1328 2090.02,1328 2065.02,1303 2065.02,1061 2011.02,1007 1570,1007
OUTD on Int2 (Signal) "OUTD_L03_P022" (solid, remove dead copper, pour order 22): 1858.11,847.94 1934.11,771.94 1934.11,505.94 2009.11,430.94 3028.11,430.94 3028.11,296.94 1895.11,296.94 1812.11,379.94 1812.11,758.94 1769.11,801.94 1571,801.94 1571,822.59 1631.76,822.59 1657.1,847.94

## Keep-outs
Keep-Out Layer:
  the board outline again, w10

## Other copper
Top Layer:
  pour cut-out: 653.16,1005 653.16,905 693,905 693,1005
  pour cut-out: 872,1021.12 863.81,1029.31 856.19,1029.31 856.19,909.25 872,909.25
  pour cut-out: 666.76,247.79 674.76,247.79 674.76,232.12 666.76,232.12
  pour cut-out: 609.36,232.12 732.17,232.12 732.17,220.55 730.17,218.55 729.91,218.8 611.36,218.8 609.36,220.8
  pour cut-out: 664.76,226.5 676.76,226.5 676.76,179 664.76,179
  pour cut-out: 2104,861 2104,817 2074,817 2074,861
  pour cut-out: 2098,1088.12 2098,1039 2074,1039 2074,1088.12
Int2 (Signal):
  pour cut-out: 1561.97,1007 1562.94,1006.03 1562.94,897.57
  pour cut-out: 3036.09,1322.76 3036.09,578.18 2101.22,578.18 2073.04,606.35 2073.04,1299.67 2093.34,1319.97
Bottom Layer:
  pour cut-out: 876,457.72 872.89,460.83 737.12,460.83 732.5,456.2 755.06,456.2 756.26,457.4
  pour cut-out: 732.84,1178.84 799.84,1178.84 800,1179 800,1086 768.35,1086 732.5,1121.85
  pour cut-out: 732.84,1339 732.84,1178.84 732.5,1178.5 693,1217.99 693,1299.16

## Silkscreen, mask and mechanical layers (free items; w line width, h text height)
Top Overlay:
  lines w6: 8,1761 25,1761 16,1761 16,1746 16,1776 ; 19,1532 19,1585 ; 669.5,179 669.5,284 ; 609,179 609,284 730,284 730,179 609,179 ; 809,830 809,882 910,882 910,830 809,830 ; 887.75,586.96 887.75,687.96 939.75,687.96 939.75,586.96 887.75,586.96 ; 950,587 950,688 1002,688 1002,587 950,587 ; 952,1263 952,1364 1004,1364 1004,1263 952,1263 ; 1688,1251 1789,1251 1789,1303 1688,1303 1688,1251 ; 1690,601 1791,601 1791,653 1690,653 1690,601 ; 1730,1132 1730,1233 1782,1233 1782,1132 1730,1132 ; 1731,670 1731,771 1783,771 1783,670 1731,670 ; 1748,1321 1849,1321 1849,1373 1748,1373 1748,1321 ; 1749,531 1850,531 1850,583 1749,583 1749,531 ; 2023,627 2124,627 2124,679 2023,679 2023,627 ; 2024,1226 2125,1226 2125,1278 2024,1278 2024,1226 ; 2097,981 2097,1082 2149,1082 2149,981 2097,981 ; 2098,824 2098,925 2150,925 2150,824 2098,824
  text "H_BRIDGE" at 2155,1783 h30
  text "DRV8432" at 2155,1720.5 h30
  text "VER: 1.1" at 2155,1663 h30
  text "REMOVE P7 IF PVDD > 12V" at 1016,1585 h30
  text "PVDD" at 1076,1496 h30
  text "GVDD" at 1077,1430 h30
  text "GND" at 311,1325 h30
  text "GND" at 311,1224.56 h30
  text "OTW" at 311,1124.11 h30
  text "FAULT" at 311,1023.67 h30
  text "PWM_A" at 311,928.22 h30
  text "RESET_AB" at 311,827.78 h30
  text "PWM_B" at 311,727.33 h30
  text "PWM_C" at 311,626.89 h30
  text "RESET_CD" at 311,526.44 h30
  text "PWM_D" at 311,426 h30
  text "OTW" at 1386,330 h30
  text "FAULT" at 1088,329 h30
  text "FAULT = 1: OVER TEMPERATURE" at 1085,248 h30
  text "OTW = 1: OVER CURRENT" at 1085,203 h30
Bottom Overlay:
  text "GND" at 361.03,1325 h30
  text "GND" at 361.03,1224.56 h30
  text "OTW" at 361.03,1124.11 h30
  text "FAULT" at 401.02,1023.67 h30
  text "PWM_A" at 401.02,928.22 h30
  text "RESET_AB" at 461,827.78 h30
  text "PWM_B" at 401.02,727.33 h30
  text "PWM_C" at 401.02,626.89 h30
  text "RESET_CD" at 461,526.44 h30
  text "PWM_D" at 401.02,426 h30
  text "AHEWX" at 2554.7,35.16 h300

## Text inside footprints (layer, text, board x,y; h text height)
D1: Top Overlay "+" at 1048.99,1430.97 h30 r90
D2: Top Overlay "+" at 1049.5,1501 h30 r90
D3: Top Overlay "+" at 1067.5,404 h30 r270
D4: Top Overlay "+" at 1336.99,404 h30 r270
LOGO1: Top Overlay "PAY IT FORWARD" at 2240,40 h37.5